# EAGLE board Passive Attentuator (EAGLE 6.5.0)

No outline drawn. Coordinates in mm, seen from the top.
Copper layers (1*16): Top 0.035mm / dielectric 1.5mm / Bottom 0.035mm
Design rules "default": minimum track width 10mil, minimum drill 24mil, track to track 8mil, track to pad 8mil, pad to pad 8mil, via to via 8mil, smd to smd 8mil, copper to edge 40mil, drill to drill 8mil, minimum pad ring 10mil, minimum via ring 8mil, stop-mask expansion 4mil, vias tented up to drill 0mil, thermal gap 10mil

## Placement (x,y rotation side)
E$1  [4U_2]  0,0 0 top
E$2  [POTENTIOMETER_TAYDA_6MM]  25.4,142.24 180 top
E$3  [POTENTIOMETER_TAYDA_6MM]  25.4,113.03 180 top
E$4  [POTENTIOMETER_TAYDA_6MM]  25.4,83.82 180 top
E$5  [POTENTIOMETER_TAYDA_6MM]  25.4,54.61 180 top
E$6  [POTENTIOMETER_TAYDA_6MM]  25.4,25.4 180 top
E$7  [3.5MM_JACK_TAYDA]  8.89,156.21 270 top
E$8  [3.5MM_JACK_TAYDA]  8.89,127 270 top
E$9  [3.5MM_JACK_TAYDA]  41.91,127 90 top
E$10  [3.5MM_JACK_TAYDA]  41.91,156.21 90 top
E$11  [3.5MM_JACK_TAYDA]  8.89,97.79 270 top
E$12  [3.5MM_JACK_TAYDA]  8.89,68.58 270 top
E$13  [3.5MM_JACK_TAYDA]  41.91,68.58 90 top
E$14  [3.5MM_JACK_TAYDA]  41.91,97.79 90 top
E$15  [3.5MM_JACK_TAYDA]  8.89,39.37 270 top
E$16  [3.5MM_JACK_TAYDA]  41.91,39.37 90 top

## Library data of the parts
E$1-E$16 = !synth_panel